# Altium PCB SoulBoard.PcbDoc
Units mil, origin at the board's own origin, x right, y up, seen from the top; angles counter-clockwise.
Board outline 1825 x 2975 mil, 2 copper layers (Top Layer, Bottom Layer); 42 components, 51 nets, 212 pads, 42 vias.
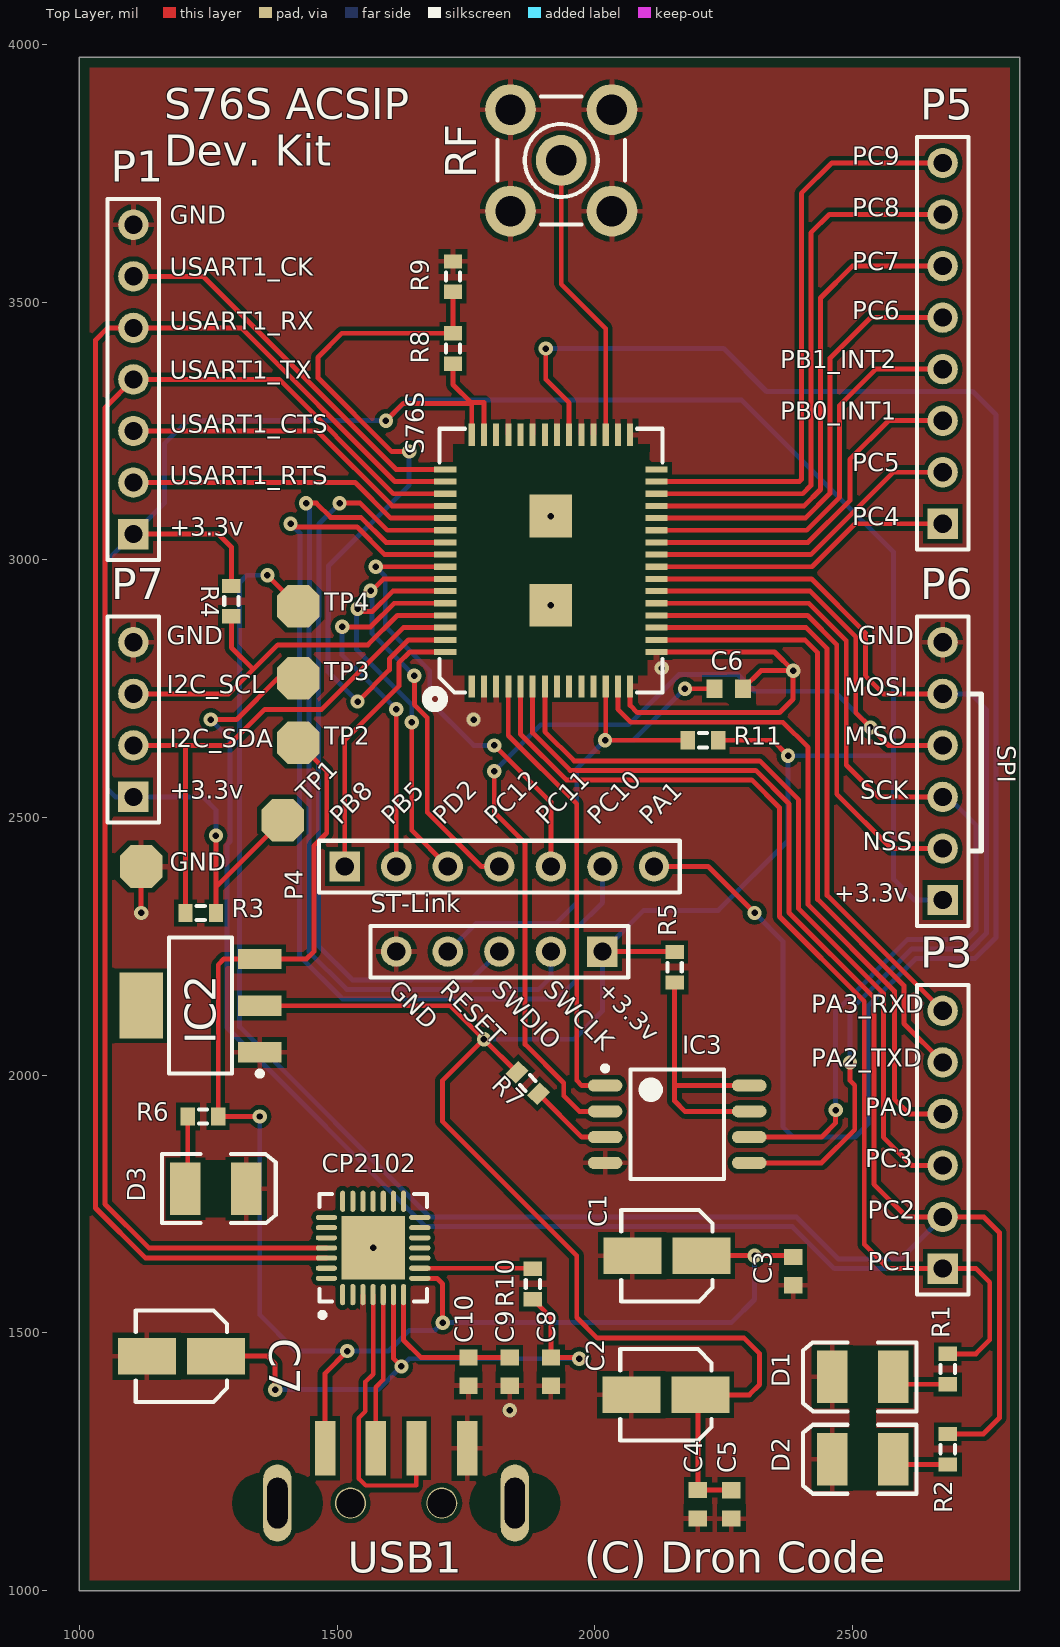
[diagram p0: Top Layer view]
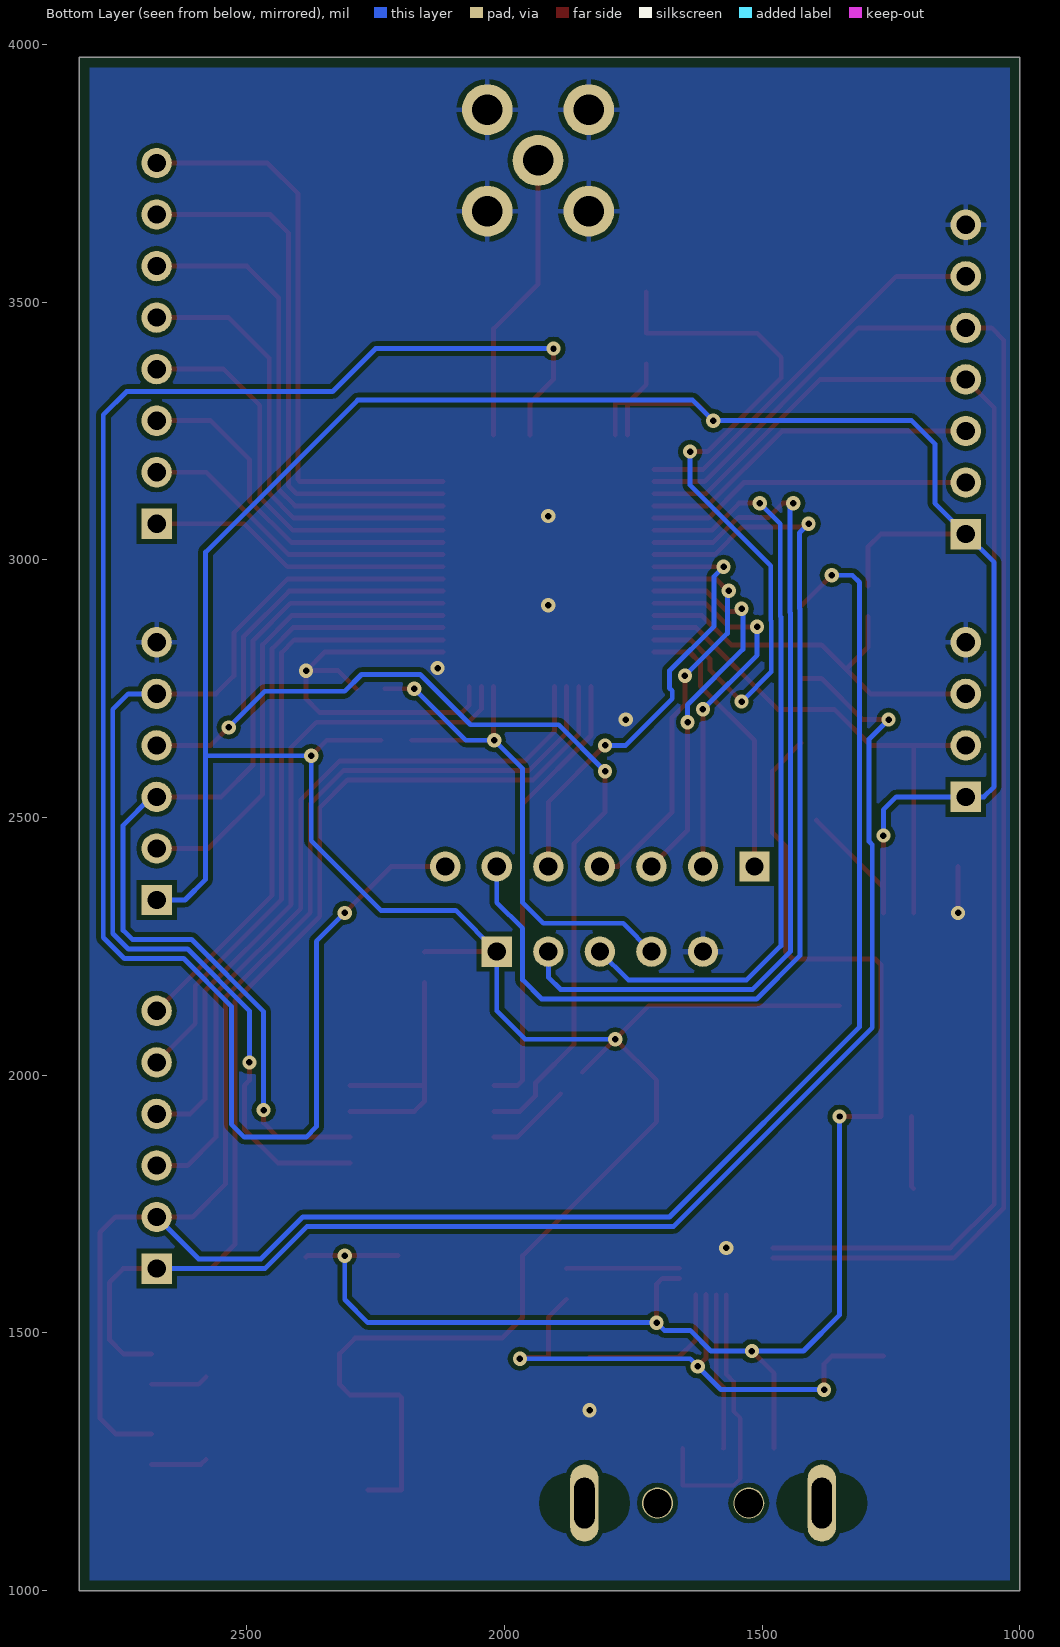
[diagram p1: Bottom Layer view, seen from below]

## Layer stack, top to bottom
Top Solder: solder mask 0.4, Solder Resist, Dk 3.5
Top Layer: signal copper 1.4
Dielectric 1: dielectric 12.6, FR-4, Dk 4.8
Bottom Layer: signal copper 1.4
Bottom Solder: solder mask 0.4, Solder Resist, Dk 3.5

## Board outline
1000,1000 2825,1000 2825,3975 1000,3975

## Design rules (kind name [scope] priority, off if disabled: settings)
BoardOutlineClearance [All] p1: gap=19.68 ignorepadtopadclearanceinfootprint=FALSE
Clearance [All] p1: gap=9.06 ignorepadtopadclearanceinfootprint=TRUE
DiffPairsRouting [All] p1: maxlimit=78.74 minlimit=8.66 mostfreqgap=8.66 toplayer_minwidth=8.66 toplayer_maxwidth=78.74 toplayer_prefwidth=8.66 bottomlayer_minwidth=8.66 bottomlayer_maxwidth=78.74 bottomlayer_prefwidth=8.66 maxuncoupledlength=500
PolygonConnect FixVias [InNet('GND') vs IsVia] p1: connectstyle=Direct reliefconductorwidth=10 reliefentries=4 polygonreliefangle="90 Angle" airgapwidth=10
PolygonConnect ViaNoSpaceConnection [InNet('GND') vs IsVia] p2: thpad.connectstyle=Direct thpad.reliefconductorwidth=10 thpad.reliefentries=4 thpad.polygonreliefangle="90 Angle" thpad.airgapwidth=10 smdpad.connectstyle=Direct smdpad.reliefconductorwidth=10 smdpad.reliefentries=4 smdpad.polygonreliefangle="90 Angle" smdpad.airgapwidth=10 via.connectstyle=Relief via.reliefconductorwidth=10 via.reliefentries=4 via.polygonreliefangle="90 Angle" via.airgapwidth=10
PolygonConnect [All] p3: connectstyle=Relief reliefconductorwidth=10 reliefentries=4 polygonreliefangle="90 Angle" airgapwidth=10
RoutingVias [All] p1: holewidth=12.6 width=27.56 viastyle="Through Hole" minholewidth=12.6 minwidth=27.56 maxholewidth=12.6 maxwidth=27.56
SolderMaskExpansion [All] p1: expansion=4
Width [All] p1: maxlimit=196.85 minlimit=8.66 preferedwidth=9.45
29 further rules are at their usual default settings.

## Classes and differential pairs
component class USB_To_UART: C7 C8 C9 C10 CP2102 R10
component class SouldBoard: C1 C2 C3 C4 C5 C6 D1 D2 D3 GND IC2 IC3 P1 P3 P4 P5 P6 P7 R1 R2 R3 R4 R5 R6 R7 R8 R9 R11 RF S76S ST-Link TP1 TP2 TP3 TP4 USB1
differential pair USB_D: +USB_D_P -USB_D_N

## Components (designator, comment, footprint, x,y, rotation, side; value= is the part's Value field where it differs from the comment)
C1 "ECAP_A" CAPAE4645X63M 2140,1650 r180 top value=10uF
C2 "ECAP_A" CAPAE4645X63M 2138.07,1380 r180 top value=22uF
C3 "SMD_0603" 1608[0603] 2385,1620 r90 top value=100nF
C4 "SMD_0603" 1608[0603] 2200,1167.56 r90 top value=10uF
C5 "SMD_0603" 1608[0603] 2265,1167.44 r90 top value=100nF
C6 "SMD_0603" 1608[0603] 2260,2750 r180 top value=100nF
C7 "ECAP_A" CAPAE4645X63M 1198.07,1455 r180 top value=4.7uF
C8 "SMD_0603" 1608[0603] 1915,1425 r90 top value=100nF
C9 "SMD_0603" 1608[0603] 1835,1425 r90 top value=100nF
C10 "SMD_0603" 1608[0603] 1755,1425 r90 top value=100nF
CP2102 "CP2102" QFN28 1570,1665 r90 top (schematic designator IC4)
D1 "LED_HFAULT" 3.5X2.8X1.9 2520,1415 r180 top
D2 "LED_NICE" 3.5X2.8X1.9 2520,1255 r180 top
D3 "LED_POWER" 3.5X2.8X1.9 1265,1780 r0 top
GND "Ground" TestPoint 1120,2405 r0 top (schematic designator TP5)
IC2 "AMS1117-3v3" SOT223 1235,2135 r180 top
IC3 "W25Q32FVSSIG" SOIC8_208mil 2160,1905 r0 top
P1 "USART" HDR1X7 1105,3050 r90 top
P3 "IO#2" HDR1X6 2675,1625 r90 top
P4 "IO#1" HDR1X7 1515,2405 r0 top
P5 "IO#3" HDR1X8 2675,3070 r90 top
P6 "SPI" HDR1X6 2675,2340 r90 top
P7 "I2C" HDR1X4 1105,2540 r90 top
R1 "SMD_0603" J1-0603 2685,1430 r90 top value=500R
R2 "SMD_0603" J1-0603 2685,1274.53 r90 top value=500R
R3 "SMD_0603" J1-0603 1235.47,2315 r0 top value=4K7
R4 "SMD_0603" J1-0603 1295,2920 r90 top value=4K7
R5 "SMD_0603" J1-0603 2155,2209.53 r90 top value=0R
R6 "SMD_0603" J1-0603 1240,1920 r0 top value=500R
R7 "SMD_0603" J1-0603 1870,1985 r315 top value=0R
R8 "SMD_0603" J1-0603 1725,3410 r270 top value="0R (NC)"
R9 "SMD_0603" J1-0603 1725,3549.53 r270 top value=10K
R10 "SMD_0603" J1-0603 1880,1595 r90 top value=4K7
R11 "SMD_0603" J1-0603 2210,2650 r0 top value=4K7
RF "SMB" SMB_V-RJ45 1935,3775 r0 top (schematic designator P8)
S76S "S76S" S76S 1915,3000 r90 top locked (schematic designator IC1)
ST-Link "STLink" HDR1X5 2015,2240 r180 top (schematic designator P2)
TP1 "Check 3.3v" TestPoint 1395,2495 r0 top
TP2 "Check 5v from USB" TestPoint 1425,2645 r0 top
TP3 "Check Hard Fault" TestPoint 1425,2770 r0 top
TP4 "Check for Nice" TestPoint 1425,2910 r0 top
USB1 "USB_ASM" PCBComponent_1 1614.68,1177.87 r0 top

## Footprints (in the part's own frame and the unit in brackets; to place one, negate y for a bottom-side part, rotate by r counter-clockwise, add the part's x,y. Pads: shape width x height; smd on the part's side, far side on the other; paste and mask are expansions set on the pad)
3.5X2.8X1.9 [mm] "SM LED; 2 C-Bend Leads; Body 3.5 x 2.8 x 1.9 mm, inc leads (LxWxH typ)"
  rect 1.5x2.6 smd: 1(-1.5,0) 2(1.5,0)
  silkscreen extent -2.65,-1.7 2.95,1.7
1608[0603] [mm] "Chip Capacitor, Body 1.6x0.8mm, IPC High Density"
  rect 0.8x0.9 smd: 1(-0.7,0) 2(0.7,0)
  body extent -0.87,-0.48 0.87,0.48, height 1.3
CAPAE4645X63M [mm] "Aluminum Electrolytic Capacitor, Body 4,50x4,50x6,30mm, IPC Low Density"
  rect 2.85x1.8 smd: 1(-1.7,0) 2(1.7,0)
  silkscreen extent -2.25,-2.25 2.25,2.25, body extent -2.3,-2.25 2.3,2.25, height 6.3
HDR1X4 [mm] "Connector; Header; 4 Position"
  rect 1.5x1.5 hole 0.9: 1(0,0)
  round 1.5 hole 0.9: 2(2.54,0) 3(5.08,0) 4(7.62,0)
  silkscreen extent -1.27,-1.27 8.89,1.27
HDR1X5 [mm] "Connector; Header; 5 Position"
  rect 1.5x1.5 hole 0.9: 1(0,0)
  round 1.5 hole 0.9: 2(2.54,0) 3(5.08,0) 4(7.62,0) 5(10.16,0)
  silkscreen extent -1.27,-1.27 11.43,1.27
HDR1X6 [mm] "Connector; Header; 6 Position"
  rect 1.5x1.5 hole 0.9: 1(0,0)
  round 1.5 hole 0.9: 2(2.54,0) 3(5.08,0) 4(7.62,0) 5(10.16,0) 6(12.7,0)
  silkscreen extent -1.27,-1.27 13.97,1.27
HDR1X7 [mm] "Connector; Header; 7 Position"
  rect 1.5x1.5 hole 0.9: 1(0,0)
  round 1.5 hole 0.9: 2(2.54,0) 3(5.08,0) 4(7.62,0) 5(10.16,0) 6(12.7,0) 7(15.24,0)
  silkscreen extent -1.27,-1.27 16.51,1.27
HDR1X8 [mm] "Connector; Header; 8 Position"
  rect 1.5x1.5 hole 0.9: 1(0,0)
  round 1.5 hole 0.9: 2(2.54,0) 3(5.08,0) 4(7.62,0) 5(10.16,0) 6(12.7,0) 7(15.24,0) 8(17.78,0)
  silkscreen extent -1.27,-1.27 19.05,1.27
J1-0603 [mm] "Chip Resistor, Body 1.6x0.8mm, IPC High Density"
  rect 0.7x0.9 smd: 1(-0.75,0) 2(0.75,0)
  silkscreen extent -0.2,-0.35 0.2,0.35, body extent -0.85,-0.48 0.85,0.48, height 0.9
PCBComponent_1 [mm]
  rect 1x2.7 smd: 1(-3.5,2.5) 2(-1,2.5) 3(1,2.5) 4(3.5,2.5)
  oval 1.4x3.8 hole 2.5 slot 1 at 0 deg: 5(5.85,-0.2) 6(-5.85,-0.2)
  round 1.524 hole 1.4 unplated: 7(-2.25,-0.2) 8(2.25,-0.2)
  body extent -6.3,-17.92 6.3,2, height 4.5
QFN28 [mm]
  oval 1.05x0.25 smd: 1(-2.3,1.5) 2(-2.3,1) 3(-2.3,0.5) 4(-2.3,0) 5(-2.3,-0.5) 6(-2.3,-1) 7(-2.3,-1.5) 15(2.3,-1.5) 16(2.3,-1) 17(2.3,-0.5) 18(2.3,0) 19(2.3,0.5) 20(2.3,1) 21(2.3,1.5)
  oval 0.25x1.05 smd: 8(-1.5,-2.3) 9(-1,-2.3) 10(-0.5,-2.3) 11(0,-2.3) 12(0.5,-2.3) 13(1,-2.3) 14(1.5,-2.3) 22(1.5,2.3) 23(1,2.3) 24(0.5,2.3) 25(0,2.3) 26(-0.5,2.3) 27(-1,2.3) 28(-1.5,2.3)
  rect 3.13x3.13 smd: 29(0,0)
  silkscreen extent -3.42,-2.65 2.65,2.65, body extent -2.52,-2.52 2.52,2.52, height 0.9
S76S [mm] "ACSIP S76S Footprint"
  rect 1.1x0.3 smd mask+0.05: 1(-6.241,3.9) 2(-6.241,3.3) 3(-6.241,2.7) 4(-6.241,2.1) 5(-6.241,1.5) 6(-6.241,0.9) 7(-6.241,0.3) 8(-6.241,-0.3) 9(-6.241,-0.9) 10(-6.241,-1.5) 11(-6.241,-2.1) 12(-6.241,-2.7) 13(-6.241,-3.3) 14(-6.241,-3.9) 31(6.159,-3.9) 32(6.159,-3.3) 33(6.159,-2.7) 34(6.159,-2.1) 35(6.159,-1.5) 36(6.159,-0.9) 37(6.159,-0.3) 38(6.159,0.3) 39(6.159,0.9) 40(6.159,1.5) 41(6.159,2.1) 42(6.159,2.7) 43(6.159,3.3) 44(6.159,3.9)
  rect 0.3x1.1 smd mask+0.05: 15(-4.541,-5.2) 16(-3.941,-5.2) 17(-3.341,-5.2) 18(-2.741,-5.2) 19(-2.141,-5.2) 20(-1.541,-5.2) 21(-0.941,-5.2) 22(-0.341,-5.2) 23(0.259,-5.2) 24(0.859,-5.2) 25(1.459,-5.2) 26(2.059,-5.2) 27(2.659,-5.2) 28(3.259,-5.2) 29(3.859,-5.2) 30(4.459,-5.2) 45(4.459,5.2) 46(3.859,5.2) 47(3.259,5.2) 48(2.659,5.2) 49(2.059,5.2) 50(1.459,5.2) 51(0.859,5.2) 52(0.259,5.2) 53(-0.341,5.2) 54(-0.941,5.2) 55(-1.541,5.2) 56(-2.141,5.2) 57(-2.741,5.2) 58(-3.341,5.2) 59(-3.941,5.2) 60(-4.541,5.2)
  rect 2.1x2.1 smd mask+0.05: 61(-2.241,0) 62(2.159,0)
  silkscreen extent -7.26,-5.5 6.46,6.11
SMB_V-RJ45 [mm] "Connector; SMB Straight"
  round 2.5 hole 1.5: 1(0,0) 2(-2.5,-2.5) 2(-2.5,2.5) 2(2.5,-2.5) 2(2.5,2.5)
  silkscreen extent -3.15,-3.15 3.15,3.15
SOIC8_208mil [mm]
  oval 1.7x0.6 smd: 1(-3.55,1.905) 2(-3.55,0.635) 3(-3.55,-0.635) 4(-3.55,-1.905) 5(3.55,-1.905) 6(3.55,-0.635) 7(3.55,0.635) 8(3.55,1.905)
  silkscreen extent -3.67,-2.7 2.3,2.88, body extent -3.95,-2.7 3.95,2.7, height 1.95
SOT223 [mm]
  rect 2.15x1 smd: 1(-2.925,2.3) 2(-2.925,0) 3(-2.925,-2.3)
  rect 2.15x3.25 smd: 4(2.925,0)
  silkscreen extent -3.05,-3.35 1.55,3.47, body extent -3.5,-3.35 3.5,3.35, height 1.8
TestPoint [mm]
  oct 2.1x2.1 smd mask+0.05: 1(0,0)

## Part data
C1 C2 C7: library part "Cap Pol1", "Polarized Capacitor (Radial)", LatestRevisionDate=17-Jul-2002, LatestRevisionNote="Re-released for DXP Platform.", PackageDescription="Polarized Capacitor (Radial); 2 Leads", PackageReference=RB7.6-15, Published=8-Jun-2000, Publisher="Altium Limited"
C3 C4 C5 C6 C8 C9 C10: library part "Cap Semi", "Capacitor (Semiconductor SIM Model)", LatestRevisionDate=29-May-2009, LatestRevisionNote="IPC-7351 Footprint Added.", PackageDescription="Chip Capacitor", PackageReference=C1206, Published=8-Jun-2000, Publisher="Altium Limited"
CP2102: "Silabs CP2102"
D1 D2 D3: library part LED3, "Typical BLUE SiC LED", DatasheetVersion=16-Apr-2002, LatestRevisionDate=17-Dec-2003, LatestRevisionNote="PCB Footprint replaced.", PackageDescription="SM LED; 2 C-Bend Leads; Body 3.5 x 2.8 x 1.9 mm, inc leads (LxWxH typ)", PackageReference=3.5X2.8X1.9, PackageVersion=16-Apr-2002, Published=8-Jun-2000, Publisher="Altium Limited"
GND TP1 TP2 TP3 TP4: library part TP, "Test Point"
IC2: library part AMS1117_3V3, "AMS1117 5v to 3.3v"
IC3: "SPI Flash 32Mbit (4MB)"
P1 P4: library part "Header 7", "Header, 7-Pin", LatestRevisionDate=17-Jul-2002, LatestRevisionNote="Re-released for DXP Platform.", Publisher="Altium Limited"
P3 P6: library part "Header 6", "Header, 6-Pin", LatestRevisionDate=17-Jul-2002, LatestRevisionNote="Re-released for DXP Platform.", Publisher="Altium Limited"
P5: library part "Header 8", "Header, 8-Pin", LatestRevisionDate=17-Jul-2002, LatestRevisionNote="Re-released for DXP Platform.", Publisher="Altium Limited"
P7: library part "Header 4", "Header, 4-Pin", LatestRevisionDate=17-Jul-2002, LatestRevisionNote="Re-released for DXP Platform.", Publisher="Altium Limited"
R1 R2 R3 R4 R5 R6 R7 R8 R9 R10 R11: library part Res3, "Resistor", LatestRevisionDate=29-May-2009, LatestRevisionNote="IPC-7351 Footprint Added.", PackageDescription="Chip Resistor", PackageReference=J1-0603, Published=8-Jun-2000, Publisher="Altium Limited"
RF: "SMB Straight Connector", LatestRevisionDate=17-Jul-2002, LatestRevisionNote="Re-released for DXP Platform.", Publisher="Altium Limited"
S76S: "LoRa S76S"
ST-Link: library part "Header 5", "Header, 5-Pin", LatestRevisionDate=17-Jul-2002, LatestRevisionNote="Re-released for DXP Platform.", Publisher="Altium Limited"
USB1: "USB port type ASM"

## Via types
v1: diameter 27.56, hole 12.6, Top Layer to Bottom Layer, 42 vias

## Nets (pads, with @x,y where several pads share a name; then routed paths per layer and width w, separated by ;. In a path a pad name is that pad's centre, name@x,y a point inside that pad or via, vN(x,y) a via of type N, cw(c..) or ccw(c..) an arc to the next point about the centre after c; other vN are vias at no path point)
BOOT_0: R8.1 R9.2 S76S.59 | length 1444.2
  Top Layer w9.45: v1(1540,2725) 1601.5,2786.5 1601.5,2807.66 1638.67,2844.84 S76S.59 ; v1(1640,3210) 1606.17,3210 1463.08,3353.08 1463.08,3393.08 1509.53,3439.53 R8.1 R9.2
  Bottom Layer w9.45: v1(1540,2725) 1482.44,2782.56 1482.44,2881.42 1483.5,2882.48 1483.5,2988.5 1640,3145 v1(1640,3210)
CP_VDD: C7.1 C8.2 CP2102.6 R10.1 | length 1115.5
  Top Layer w9.45: C7.1 1365,1455 1380,1440 v1(1380,1390) ; CP2102.6 1609.37,1450.63 v1(1625,1435) ; R10.1 1915,1530.47 C8.2 1967.44,1452.56 v1(1970,1450)
  Bottom Layer w9.45: v1(1380,1390) 1580,1390 v1(1625,1435) 1640,1450 v1(1970,1450)
GND: C1.2 C2.2 C3.1 C4.1 C5.1 C6.1 C7.2 C8.1 C9.1 C10.1 CP2102.3 CP2102.29 D1.2 D2.2 D3.2 GND.1 IC2.1 IC3.4 P1.7 P6.6 P7.4 R9.1 RF.2 S76S.2 S76S.3 S76S.14 S76S.15 S76S.31 S76S.32 S76S.34 S76S.35 S76S.37 S76S.39 S76S.41 S76S.61 S76S.62 ST-Link.5 USB1.4 | length 907.2
  Top Layer w9.45: v1(1120,2315) GND.1 ; S76S.14 2068.54,2717.63 2082.66,2703.5 2358.5,2703.5 2385,2730 v1(2385,2785) ; S76S.15 2348.78,2821.22 v1(2385,2785) ; C6.1 2322.56,2785 v1(2385,2785)
  other v1: 1835,1350 1570,1665 1765,2690 2130,2790 1915,2911.77 1915,3085
GPIO_HFAULT: P3.1 R1.2 S76S.5 TP3.1 | length 4449
  Top Layer w9.45: v1(1255,2690) 1305,2690 1385,2770 TP3.1 ; S76S.5 1855.95,2661.72 1944.67,2572.99 2304.67,2572.99 2358.46,2519.2 2358.46,2308.03 2522.99,2143.5 2522.99,1672.01 2570,1625 P3.1 2740,1625 2766.5,1598.5 2766.5,1486.5 2739.53,1459.53 R1.2
  Bottom Layer w9.45: v1(1255,2690) 1292.56,2652.44 1292.56,2453.58 1286.5,2447.52 1286.5,2092.34 1672.34,1706.5 2383.5,1706.5 2465,1625 P3.1
GPIO_NICE: P3.2 R2.2 S76S.6 TP4.1 | length 4796.9
  Top Layer w9.45: v1(1365,2970) TP4.1 ; S76S.6 1879.57,2664.26 1952.34,2591.5 2312.34,2591.5 2376.97,2526.86 2376.97,2315.69 2541.5,2151.17 2541.5,1788.5 2605,1725 P3.2 2755,1725 2785,1695 2785,1335 2754.06,1304.06 R2.2
  Bottom Layer w9.45: v1(1365,2970) 1325,2970 1311.06,2956.06 1311.06,2093.94 1680,1725 2391.17,1725 2472.66,1643.5 2593.5,1643.5 P3.2
I2C_SCL: P7.3 R4.1 S76S.57 | length 788.8
  Top Layer w9.45: P7.3 1290,2740 1337.5,2787.5 ; R4.1 1295,2830 1337.5,2787.5 ; S76S.57 1617.09,2892.09 1560,2835 1385,2835 1337.5,2787.5
I2C_SDA: P7.2 R3.1 S76S.58 | length 1025.3
  Top Layer w9.45: P7.2 1205,2640 ; R3.1 1205.94,2639.06 1205,2640 ; S76S.58 1628.46,2868.46 1470,2710 1360,2710 1290,2640 1205,2640
NetC9_2: C9.2 C10.2 CP2102.7 | length 308.3
  Top Layer w9.45: CP2102.7 1629.06,1485.94 1662.44,1452.56 C10.2 C9.2
NetD1_1: D1.1 R1.1 | length 112
  Top Layer w9.45: D1.1 2593.58,1400.47 R1.1
NetD2_1: D2.1 R2.1 | length 110.1
  Top Layer w9.45: D2.1 2589.05,1245 R2.1
NetD3_1: D3.1 R6.1 | length 141.9
  Top Layer w9.45: D3.1 1210.47,1784.53 R6.1
NetIC3_3: IC3.3 R7.2 | length 164.2
  Top Layer w9.45: R7.2 1975,1880 IC3.3
NetIC3_7: IC3.7 IC3.8 R5.1 | length 527.8
  Top Layer w9.45: R5.1 2155,1980 ; IC3.7 2175,1930 2155,1950 2155,1980 ; IC3.8 2155,1980
NetIC4_9: CP2102.9 R10.2 | length 219.9
  Top Layer w9.45: CP2102.9 1878.9,1625.63 R10.2
NRST_SIG: C6.2 R11.1 S76S.12 ST-Link.4 | length 1146.3
  Top Layer w9.45: S76S.12 2021.3,2651.3 v1(2020,2650) R11.1 ; v1(2175,2750) C6.2
  Bottom Layer w9.45: ST-Link.4 1770,2295 1925,2295 1965,2335 1965,2595 v1(2020,2650) 2075,2650 v1(2175,2750)
PA0: P3.4 S76S.13 | length 1301.2
  Top Layer w9.45: S76S.13 2044.92,2710.08 2070,2685 2365,2685 2413.98,2636.02 2413.98,2331.02 2581.5,2163.5 2581.5,1953.5 2610,1925 P3.4
PA1: P4.7 S76S.36 | length 3513.6
  Top Layer w9.45: v1(1905,3410) 1905,3350 1950.43,3304.57 S76S.36 ; P4.7 2220,2405 v1(2310,2315)
  Bottom Layer w9.45: v1(1905,3410) 2250,3410 2333.31,3326.69 2733.31,3326.69 2778.5,3281.5 2778.5,2267.34 2737.66,2226.5 2622.66,2226.5 2530,2133.83 2530,1905 2505,1880 2385,1880 2365,1900 2365,2260 v1(2310,2315)
PA2_TXD: P3.5 S76S.16 | length 1218.5
  Top Layer w9.45: S76S.16 2407.64,2844.84 2432.48,2820 2432.48,2341.35 2600,2173.83 2600,2100 P3.5
PA3_RXD: P3.6 S76S.17 | length 1143.7
  Top Layer w9.45: S76S.17 2410.37,2868.46 2450.98,2827.85 2450.98,2349.02 P3.6
PB0_INT1: P5.3 S76S.24 | length 700
  Top Layer w9.45: S76S.24 2413.82,3033.82 2495,3115 2495,3195 2570,3270 P5.3
PB1_INT2: P5.4 S76S.25 | length 789.5
  Top Layer w9.45: S76S.25 2411.27,3057.44 2475,3121.17 2475,3300 2545,3370 P5.4
PB5: P4.2 S76S.56 | length 727.7
  Top Layer w9.45: v1(1510,2870) 1565,2870 1610.71,2915.71 S76S.56 ; P4.2 v1(1615,2710)
  Bottom Layer w9.45: v1(1510,2870) 1510,2815 v1(1615,2710)
PB8: P4.1 S76S.60 | length 537.6
  Top Layer w9.45: P4.1 1515,2650 1620,2755 1620,2800 1641.22,2821.22 S76S.60
PC3: P3.3 S76S.7 | length 1495
  Top Layer w9.45: S76S.7 1903.19,2666.81 1960,2610 2320,2610 2395.47,2534.53 2395.47,2323.36 2560,2158.83 2560,1880 2615,1825 P3.3
PC4: P5.1 S76S.22 | length 589.8
  Top Layer w9.45: S76S.22 2421.57,2986.57 2505,3070 P5.1
PC5: P5.2 S76S.23 | length 621.5
  Top Layer w9.45: S76S.23 2419.03,3010.2 2578.83,3170 P5.2
PC6: P5.5 S76S.26 | length 870.2
  Top Layer w9.45: S76S.26 2408.73,3081.06 2456.5,3128.83 2456.5,3391.5 2535,3470 P5.5
PC7: P5.6 S76S.27 | length 965.6
  Top Layer w9.45: S76S.27 2406.18,3104.69 2437.99,3136.5 2437.99,3507.99 2500,3570 P5.6
PC8: P5.7 S76S.28 | length 1066.9
  Top Layer w9.45: S76S.28 2403.63,3128.31 2419.49,3144.16 2419.49,3634.49 2455,3670 P5.7
PC9: P5.8 S76S.29 | length 1136.4
  Top Layer w9.45: S76S.29 2396.93,3151.93 2400.98,3155.98 2400.98,3710.98 2460,3770 P5.8
PC10: P4.6 S76S.52 | length 1999.9
  Top Layer w9.45: v1(1410,3070) 1416.06,3063.94 1538.73,3063.94 1592.47,3010.2 S76S.52
  Bottom Layer w9.45: v1(1410,3070) 1427.99,3052.01 1427.99,2905.47 1426.93,2904.41 1426.93,2231.9 1510.84,2147.99 1927.99,2147.99 1965,2185 1965,2285 2015,2335 P4.6
PC11: P4.5 S76S.53 | length 885.6
  Top Layer w9.45: v1(1575,2986.57) S76S.53 ; v1(1805,2640) 1915,2530 P4.5
  Bottom Layer w9.45: v1(1575,2986.57) 1593.5,2968.07 1593.5,2871.5 1680,2785 1680,2751.17 1674.58,2745.75 1674.58,2730.42 1765,2640 v1(1805,2640)
PC12: P4.4 S76S.54 | length 813.8
  Top Layer w9.45: v1(1565,2940) 1567.4,2940 1590.35,2962.95 S76S.54 ; v1(1650,2775) 1650,2718.97 1675,2693.97 1675,2510 1780,2405 P4.4
  Bottom Layer w9.45: v1(1565,2940) 1567.56,2937.44 1567.56,2857.44 v1(1650,2775)
PD2: P4.3 S76S.55 | length 768
  Top Layer w9.45: v1(1540,2905) 1545,2900 1568.83,2900 1608.16,2939.33 S76S.55 ; v1(1645,2685) 1645,2475 P4.3
  Bottom Layer w9.45: v1(1540,2905) 1537.56,2907.44 1537.56,2826.42 1645,2718.97 v1(1645,2685)
RF_ANT: RF.1 S76S.33 | length 568.3
  Top Layer w9.45: RF.1 1935,3535 2021.3,3448.7 S76S.33
SPI1_MISO: IC3.2 P6.4 S76S.20 | length 2394.3
  Top Layer w9.45: v1(1805,2590) 1805,2510 1865,2450 1865,2060 1940,1985 1940,1960 1970,1930 IC3.2 ; S76S.20 2418.01,2939.33 2506.5,2850.84 2506.5,2703.5 v1(2535,2675) 2570,2640 P6.4
  Bottom Layer w9.45: v1(1805,2590) 1895,2680 2066.03,2680 2163.58,2777.56 2277.44,2777.56 2310,2745 2465,2745 v1(2535,2675)
SPI1_MOSI: IC3.5 P6.5 S76S.21 | length 2022
  Top Layer w9.45: S76S.21 2420.55,2962.95 2525,2858.51 2525,2775 2560,2740 P6.5 ; IC3.5 2440,1830 2504.49,1894.49 2504.49,1980.51 2495,1990 v1(2495,2025)
  Bottom Layer w9.45: v1(2495,2025) 2495,2125 2615,2245 2730,2245 2760,2275 2760,2710 2730,2740 P6.5
SPI1_NSS: P6.2 S76S.18 | length 912.4
  Top Layer w9.45: S76S.18 2412.91,2892.09 2469.49,2835.51 2469.49,2545.51 2575,2440 P6.2
SPI1_SCK: IC3.6 P6.3 S76S.19 | length 1876.8
  Top Layer w9.45: S76S.19 2415.46,2915.71 2487.99,2843.18 2487.99,2602.01 2550,2540 P6.3 ; IC3.6 2439.88,1880 2467.44,1907.56 v1(2467.44,1932.44)
  Bottom Layer w9.45: v1(2467.44,1932.44) 2467.44,2123.61 2607.34,2263.5 2722.34,2263.5 2740,2281.17 2740,2485 2685,2540 P6.3
SPI_CS: IC3.1 S76S.4 | length 878.6
  Top Layer w9.45: S76S.4 1832.32,2659.17 1965,2526.49 1965,1990 1975,1980 IC3.1
SWCLK: S76S.51 ST-Link.2 | length 1735
  Top Layer w9.45: v1(1440,3110) 1460,3110 1487.56,3082.44 1546.39,3082.44 1595.01,3033.82 S76S.51
  Bottom Layer w9.45: v1(1440,3110) 1446.5,3103.5 1446.5,2897.81 1445.43,2896.74 1445.43,2239.57 1518.5,2166.5 1891.5,2166.5 1915,2190 ST-Link.2
SWDIO: S76S.50 ST-Link.3 | length 1504.2
  Top Layer w9.45: v1(1505,3110) 1545,3110 1597.56,3057.44 S76S.50
  Bottom Layer w9.45: v1(1505,3110) 1465,3070 1465,2890.14 1463.94,2889.08 1463.94,2251.06 1530,2185 1760,2185 ST-Link.3
USART1_CK: P1.6 S76S.45 | length 760.4
  Top Layer w9.45: P1.6 1240,3550 1614.45,3175.55 S76S.45
USART1_CTS: P1.3 S76S.48 | length 665.5
  Top Layer w9.45: P1.3 1461.49,3250 1606.81,3104.68 S76S.48
USART1_RTS: P1.2 S76S.49 | length 633.8
  Top Layer w9.45: P1.2 1535.33,3150 1604.26,3081.06 S76S.49
USART1_RX: CP2102.26 P1.5 S76S.46 | length 2984.4
  Top Layer w9.45: CP2102.26 1128.52,1645.31 1031.38,1742.45 1031.38,3426.38 1055,3450 P1.5 1313.83,3450 1611.9,3151.93 S76S.46
USART1_TX: CP2102.25 P1.4 S76S.47 | length 2784.6
  Top Layer w9.45: CP2102.25 1135,1665 1049.88,1750.12 1049.88,3294.88 P1.4 1387.66,3350 1609.36,3128.31 S76S.47
USB_D_N: CP2102.5 USB1.2 | length 304.4
  Top Layer w8.66: USB1.2 1575,1276.61 1575,1395 1589.68,1409.68 CP2102.5
USB_D_P: CP2102.4 USB1.3 | length 558
  Top Layer w8.66: CP2102.4 1570,1420 1555,1405 1555,1347.75 1542.24,1334.99 1542.24,1217.61 1555.79,1204.06 1654.06,1204.06 USB1.3
USBVCC: C1.1 C3.2 CP2102.8 IC2.3 R6.2 TP2.1 USB1.1 | length 3019.2
  Top Layer w9.45: v1(1350,1920) R6.2 1269.53,2214.53 1280.55,2225.55 IC2.3 1440.55,2225.55 1455,2240 1455,2445 1480,2470 1480,2590 TP2.1 ; USB1.1 1476.89,1421.89 v1(1520,1465) ; CP2102.8 1694.06,1605.94 1705,1595 v1(1705,1520) ; C1.1 v1(2310,1650) 2382.56,1650 C3.2
  Bottom Layer w9.45: v1(1350,1920) 1350,1535 1420,1465 v1(1520,1465) 1600,1465 1640,1505 1690,1505 v1(1705,1520) 2265,1520 2310,1565 v1(2310,1650)
VCC3V3: C2.1 C4.2 C5.2 IC2.2 P1.1 P6.1 P7.1 R3.2 R4.2 R5.2 R7.1 R8.2 R11.2 S76S.43 S76S.44 ST-Link.1 TP1.1 | length 7879.8
  Top Layer w9.45: P1.1@1110,3055 P1.1 1270,3050 1295,3025 R4.2 ; R3.2 1265,2365 ; v1(1265,2465) 1265,2365 ; IC2.2 1720,2135 v1(1785,2070) ; TP1.1 1265,2365 ; v1(1595,3270) 1628.54,3303.54 1761.46,3303.54 ; R8.2 1725,3340 1761.46,3303.54 ; S76S.44 1761.46,3303.54 ; S76S.43 1785.08,3304.92 1762.83,3304.92 1761.46,3303.54 ; R7.1 v1(1785,2070) ; ST-Link.1 2154.06,2240 R5.2 ; R11.2 2345,2650 v1(2375,2620) ; C5.2 2200.12,1195 C4.2 2200,1375 C2.1 2300,1380 2320,1400 2320,1460 2290,1490 2005,1490 1965,1530 1965,1650 1705,1910 1705,1990 v1(1785,2070)
  Bottom Layer w9.45: v1(1265,2465) 1265,2515 1240,2540 P7.1 1070,2540 1050,2560 1050,2995 P1.1 1165,3110 1165,3225 1210,3270 v1(1595,3270) 1635,3310 2285,3310 2580,3015 2580,2620 ; v1(1785,2070) 1960,2070 2015,2125 ST-Link.1 2095,2320 2240,2320 2375,2455 v1(2375,2620) 2580,2620 ; P6.1 2620,2340 2580,2380 2580,2620
pads on no net: CP2102.1 CP2102.2 CP2102.10 CP2102.11 CP2102.12 CP2102.13 CP2102.14 CP2102.15 CP2102.16 CP2102.17 CP2102.18 CP2102.19 CP2102.20 CP2102.21 CP2102.22 CP2102.23 CP2102.24 CP2102.27 CP2102.28 IC2.4 S76S.1 S76S.8 S76S.9 S76S.10 S76S.11 S76S.30 S76S.38 S76S.40 S76S.42 USB1.5 USB1.6 USB1.7 USB1.8

## Polygon pours and split planes (outlines as drawn)
GND on Bottom Layer "Bottom Layer-GND" (solid, pour order 2): 1000,1000 2825,1000 2825,3975 1000,3975
GND on Top Layer "Top Layer-GND" (solid, pour order 0): 1000,1000 2825,1000 2825,3975 1000,3975

## Other copper
Top Layer:
  pour cut-out: 1725,3225 2107.56,3225 2102.56,2775 1725,2775
  pour cut-out: 1225,2335 1225,2295 1245,2295 1245,2335
  pour cut-out: 1240,1835 1240,1725 1290,1725 1290,1835
  pour cut-out: 2495,1475 2495,1195 2545,1195 2545,1475

## Silkscreen, mask and mechanical layers (free items; w line width, h text height)
Top Overlay:
  lines w10: 2730,2435 2750,2435 2750,2740 2730,2740
  text "S76S ACSIP  / Dev. Kit" at 1165,3765 h60
  text "PC9" at 2500,3755 h60
  text "PC8" at 2500,3655 h60
  text "GND" at 1175,3640 h60
  text "PC7" at 2500,3550 h60
  text "USART1_CK" at 1175,3540 h60
  text "PC6" at 2500,3455 h60
  text "USART1_RX" at 1175,3435 h60
  text "PB1_INT2" at 2360,3360 h60
  text "USART1_TX" at 1175,3340 h60
  text "PB0_INT1" at 2360,3260 h60
  text "USART1_CTS" at 1175,3235 h60
  text "PC5" at 2500,3160 h60
  text "USART1_RTS" at 1175,3135 h60
  text "PC4" at 2500,3055 h60
  text "+3.3v" at 1175,3035 h60
  text "GND" at 1170,2825 h60
  text "GND" at 2510,2825 h60
  text "I2C_SCL" at 1170,2730 h60
  text "MOSI" at 2485,2725 h60
  text "SPI" at 2770,2640 h60 r270
  text "MISO" at 2485,2630 h60
  text "I2C_SDA" at 1175,2625 h60
  text "+3.3v" at 1175,2525 h60
  text "SCK" at 2515,2525 h60
  text "PB8" at 1515,2475 h60 r45
  text "PB5" at 1615,2475 h60 r45
  text "PD2" at 1715,2475 h60 r45
  text "PC12" at 1815,2475 h60 r45
  text "PC11" at 1915,2475 h60 r45
  text "PC10" at 2015,2475 h60 r45
  text "PA1" at 2115,2475 h60 r45
  text "NSS" at 2520,2425 h60
  text "+3.3v" at 2465,2325 h60
  text "GND" at 1590,2155 h60 r315
  text "RESET" at 1690,2155 h60 r315
  text "SWDIO" at 1790,2155 h60 r315
  text "SWCLK" at 1890,2155 h60 r315
  text "+3.3v" at 1995,2155 h60 r315
  text "PA3_RXD" at 2420,2110 h60
  text "PA2_TXD" at 2420,2005 h60
  text "PA0" at 2525,1910 h60
  text "PC3" at 2525,1810 h60
  text "PC2" at 2530,1710 h60
  text "PC1" at 2530,1610 h60
  text "(C) Dron Code" at 1980,1035 h60
Mechanical 13:
  lines w10: 1000,1000 2825,1000 2825,3975 1070,3975 1000,3975 1000,1000